# Altium PCB NUC972 DEV BOARD-2 20150128.PcbDoc (part 3 of 5)
Units mil, origin at the board's own origin, x right, y up, seen from the top; angles counter-clockwise.
Board outline 10236.22 x 7677.17 mil, 4 copper layers (Top, 2-GND, 3-POWER, Bottom), stack 35.4 mil thick; 572 components, 593 nets, 2369 pads, 1783 vias.
Unrouted connection lines stored in the file: 1277.
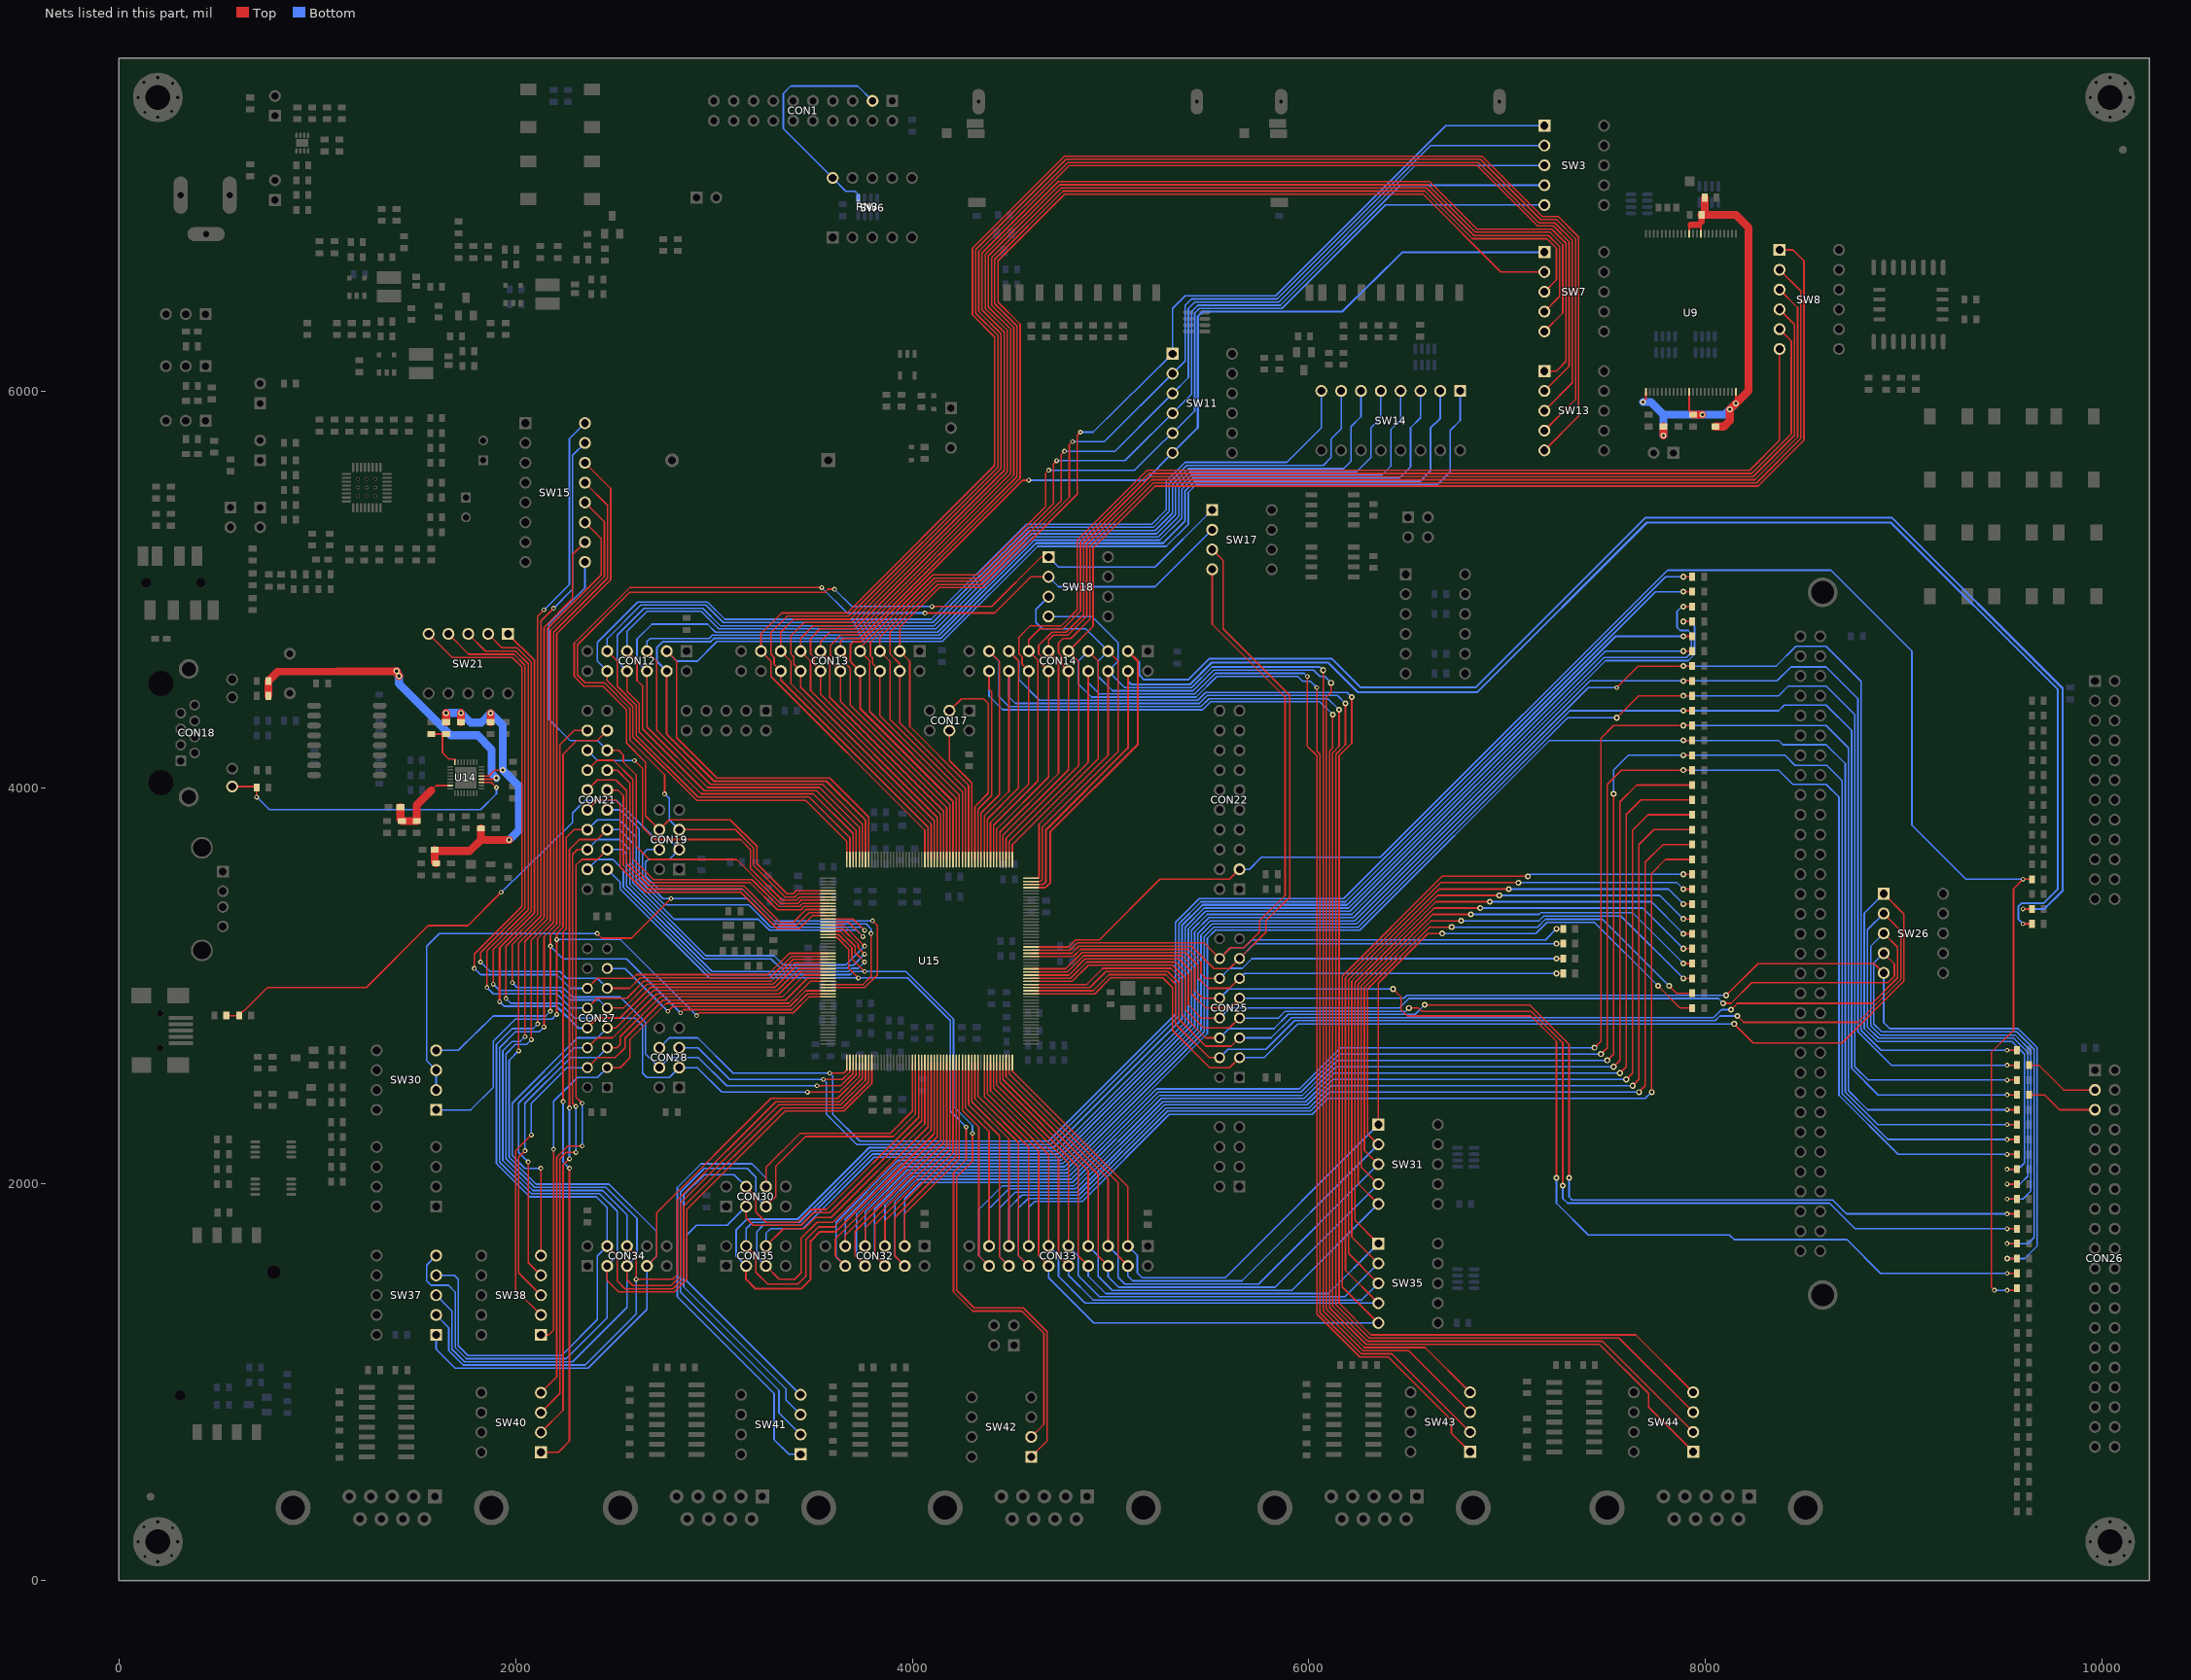
[diagram p5: the nets of this part, all layers, seen from the top]

## Via types
v1: diameter 24, hole 12, Top to Bottom, 1202 vias
v2: diameter 30, hole 16, Top to Bottom, 581 vias

## Nets (pads, with @x,y where several pads share a name; then routed paths per layer and width w, separated by ;. In a path a pad name is that pad's centre, name@x,y a point inside that pad or via, vN(x,y) a via of type N, cw(c..) or ccw(c..) an arc to the next point about the centre after c; other vN are vias at no path point) (continued)
NTRST: CON1.3 RN3.2 SW6.10 | length 1211.6
  Bottom w8: RN3.2@3728,6968.5 3728,6991 3712,7007 3666,7007 SW6.10@3599,7074 3350,7323 3350,7500 3387.5,7537.5 3725,7537.5 CON1.3@3800,7462.5
NVD33: CB2.1 CB6.1 R38.2 R40.2 RV1.2 U9.1 U9.12 U9.24 U9.34 U9.37 | length 2604.3
  Top w10: v2(7684,5944) 7700,5960 U9.1@7700,5995.37 ; U9.12@7916.54,5995.37 7916.54,5900 7917.5,5900 CB6.1@7937.5,5880 ; U9.37@7916.54,6792.62 7916.54,6829.04 7925,6837.5 ; U9.34@7975.59,6792.62 7975.59,6850 ; v2(8152.76,5937.5) U9.24@8152.76,5995.37
  Top w30: 7925,6837.5 7963.09,6837.5 7975.59,6850 7980,6854.41 CB2.1@7980,6887.5
  Top w40: v2(7787.5,5775) R38.2@7787.5,5820 ; CB6.1@7937.5,5880 v2(7984,5880) ; CB2.1@7980,6887.5 7995,6887.5 ; RV1.2@7995,6975 7995,6887.5 ; R40.2@8050,5820 8092,5820 8122,5850 v2(8122,5907) 8152.5,5937.5 v2(8152.76,5937.5) 8216,6000.74 8216,6824 8152.5,6887.5 7995,6887.5
  Bottom w40: v2(7684,5944) 7723.5,5944 7787.5,5880 ; v2(7787.5,5775) 7787.5,5880 ; v2(8152.76,5937.5) 8095.26,5880 v2(7984,5880) 7787.5,5880
NWAIT: CON26.3 RB5.2 | length 384.3
  Top w8: RB5.2@9630,2600 9680,2600 9805,2475 CON26.3@9962.5,2475
NWE: CON26.5 RB7.2 | length 363.6
  Top w8: RB7.2@9630,2450 9709,2450 9784,2375 CON26.5@9962.5,2375
PA0: CON33.3 RL1.1 SW31.1 U15.54 | length 5469.6
  Top w8: U15.54@4504.82,2613.19 4504.82,2570.18 5087.5,1987.5 CON33.3@5087.5,1687.5 ; SW31.1@6350,2300 6350,3014 6600,3264 v2(6672,3264) ; v2(7760,2999.5) 7872,2887.5 RL1.1@7932.5,2887.5
  Bottom w8: CON33.3@5087.5,1687.5 5135,1640 5135,1553 5161,1527 5577,1527 SW31.1@6350,2300 ; v2(6672,3264) 7144,3264 7200,3320 7439.5,3320 v2(7760,2999.5)
PA1: CON33.4 RL2.1 SW31.2 U15.53 | length 5625.9
  Top w8: U15.53@4489.07,2613.19 4489.07,2555.93 5037.5,2007.5 5037.5,1637.5 CON33.4@5087.5,1587.5 ; SW31.2@6350,2200 6296,2254 6296,2984 6608,3296 v2(6720,3296) ; v2(7816,3000) 7853.5,2962.5 RL2.1@7932.5,2962.5
  Bottom w8: CON33.4@5087.5,1587.5 5087.5,1536 5111.5,1512 5662,1512 SW31.2@6350,2200 ; v2(6720,3296) 7152,3296 7192,3336 7480,3336 v2(7816,3000)
PA2: CON33.5 RL3.1 SW31.3 U15.52 | length 5746.2
  Top w8: U15.52@4473.33,2613.19 4473.33,2541.67 4987.5,2027.5 CON33.5@4987.5,1687.5 ; SW31.3@6350,2100 6280,2170 6280,2992 6616,3328 v2(6768,3328) ; v2(7888,3037.5) RL3.1@7932.5,3037.5
  Bottom w8: CON33.5@4987.5,1687.5 5037.5,1637.5 5037.5,1530.5 5072,1496 5746,1496 SW31.3@6350,2100 ; v2(6768,3328) 7160,3328 7184,3352 7573.5,3352 v2(7888,3037.5)
PA3: CON33.6 RL4.1 SW31.4 U15.51 | length 5862.2
  Top w8: U15.51@4457.58,2613.19 4457.58,2527.42 4937.5,2047.5 4937.5,1637.5 CON33.6@4987.5,1587.5 ; SW31.4@6350,2000 6264,2086 6264,3000 6624,3360 v2(6816,3360) ; v2(7888,3112.5) RL4.1@7932.5,3112.5
  Bottom w8: CON33.6@4987.5,1587.5 4987.5,1532.5 5040,1480 5830,1480 SW31.4@6350,2000 ; v2(6816,3360) 7159.5,3360 7167.5,3368 7632.5,3368 v2(7888,3112.5)
PA4: CON33.7 RL5.1 SW31.5 U15.50 | length 5984.8
  Top w8: U15.50@4441.83,2613.19 4441.83,2513.17 4887.5,2067.5 CON33.7@4887.5,1687.5 ; SW31.5@6350,1900 6248,2002 6248,3008 6632,3392 v2(6864,3392) ; v2(7888,3187.5) RL5.1@7932.5,3187.5
  Bottom w8: CON33.7@4887.5,1687.5 4937.5,1637.5 4937.5,1534.5 5008,1464 5914,1464 SW31.5@6350,1900 ; v2(6864,3392) 7683.5,3392 v2(7888,3187.5)
PA5: CON33.8 RL6.1 SW35.1 U15.49 | length 6172.6
  Top w8: U15.49@4426.08,2613.19 4426.08,2498.92 4837.5,2087.5 4837.5,1637.5 CON33.8@4887.5,1587.5 ; SW35.1@6350,1700 6232,1818 6232,3016 6640,3424 v2(6912,3424) ; v2(7888,3262.5) RL6.1@7932.5,3262.5
  Bottom w8: CON33.8@4887.5,1587.5 4887.5,1536.5 4976,1448 6098,1448 SW35.1@6350,1700 ; v2(6912,3424) 7726.5,3424 v2(7888,3262.5)
PA6: CON33.9 RL7.1 SW35.2 U15.48 | length 6301.9
  Top w8: U15.48@4410.33,2613.19 4410.33,2484.67 4787.5,2107.5 CON33.9@4787.5,1687.5 ; SW35.2@6350,1600 6216,1734 6216,3024 6648,3456 v2(6960,3456) ; v2(7888,3337.5) RL7.1@7932.5,3337.5
  Bottom w8: CON33.9@4787.5,1687.5 4837.5,1637.5 4837.5,1538.5 4944,1432 6182,1432 SW35.2@6350,1600 ; v2(6960,3456) 7769.5,3456 v2(7888,3337.5)
PA7: CON33.10 RL8.1 SW35.3 U15.47 | length 6431.1
  Top w8: U15.47@4394.59,2613.19 4394.59,2470.41 4737.5,2127.5 4737.5,1637.5 CON33.10@4787.5,1587.5 ; SW35.3@6350,1500 6200,1650 6200,3032 6656,3488 v2(7008,3488) ; v2(7888,3412.5) RL8.1@7932.5,3412.5
  Bottom w8: CON33.10@4787.5,1587.5 4787.5,1540.5 4912,1416 6266,1416 SW35.3@6350,1500 ; v2(7008,3488) 7812.5,3488 v2(7888,3412.5)
PA8: CON33.11 RL9.1 SW35.4 U15.46 | length 6565
  Top w8: U15.46@4378.84,2613.19 4378.84,2456.16 4687.5,2147.5 CON33.11@4687.5,1687.5 ; SW35.4@6350,1400 6184,1566 6184,3040 6664,3520 v2(7056,3520) ; v2(7888,3487.5) RL9.1@7932.5,3487.5
  Bottom w8: CON33.11@4687.5,1687.5 4737.5,1637.5 4737.5,1534.5 4872,1400 SW35.4@6350,1400 ; v2(7056,3520) 7855.5,3520 v2(7888,3487.5)
PA9: CON33.12 RL10.1 SW35.5 U15.45 | length 6777.2
  Top w8: U15.45@4363.09,2613.19 4363.09,2441.91 4637.5,2167.5 4637.5,1637.5 CON33.12@4687.5,1587.5 ; SW35.5@6350,1300 6168,1482 6168,3048 6672,3552 v2(7104,3552) ; v2(7888,3562.5) RL10.1@7932.5,3562.5
  Bottom w8: CON33.12@4687.5,1587.5 4687.5,1528.5 4916,1300 SW35.5@6350,1300 ; v2(7104,3552) 7114.5,3562.5 v2(7888,3562.5)
PA10: CON33.13 RL11.1 U15.43 | length 5945.9
  Top w8: U15.43@4331.59,2613.19 4331.59,2443.41 4587.5,2187.5 CON33.13@4587.5,1687.5 ; v2(7728,2464) 7728,3568 7797.5,3637.5 RL11.1@7932.5,3637.5
  Bottom w8: CON33.13@4587.5,1687.5 4587.5,1883.5 4616,1912 4856,1912 5296,2352 6016,2352 6096,2432 7696,2432 v2(7728,2464)
PA11: CON33.14 RL12.1 U15.42 | length 6268.4
  Top w8: U15.42@4315.85,2613.19 4315.85,2429.15 4536,2209 4536,1639 CON33.14@4587.5,1587.5 ; v2(7664,2464) 7696,2496 7696,3624 7784.5,3712.5 RL12.1@7932.5,3712.5
  Bottom w8: CON33.14@4587.5,1587.5 4536,1639 4536,1880 4584,1928 4848,1928 5288,2368 6008,2368 6104,2464 v2(7664,2464)
PA12: CON33.15 RL13.1 U15.41 | length 6124.2
  Top w8: U15.41@4300.1,2613.19 4300.1,2415 4487.5,2227.6 CON33.15@4487.5,1687.5 ; v2(7632,2496) 7664,2528 7664,3712 7739.5,3787.5 RL13.1@7932.5,3787.5
  Bottom w8: CON33.15@4487.5,1687.5 4487.5,1879.5 4552,1944 4840,1944 5280,2384 6000,2384 6112,2496 v2(7632,2496)
PA13: CON33.16 RL14.1 U15.40 | length 6452.7
  Top w8: U15.40@4284.35,2613.19 4284.35,2400 4440,2244.35 4440,1635 CON33.16@4487.5,1587.5 ; v2(7600,2528) 7632,2560 7632,3784 7710.5,3862.5 RL14.1@7932.5,3862.5
  Bottom w8: CON33.16@4487.5,1587.5 4440,1635 4440,1880 4520,1960 4832,1960 5272,2400 5992,2400 6120,2528 v2(7600,2528)
PA14: CON33.17 RL15.1 U15.39 | length 6307.2
  Top w8: U15.39@4268.6,2613.19 4268.6,2385 4387.5,2266.1 CON33.17@4387.5,1687.5 ; v2(7568,2560) 7600,2592 7600,3864 7673.5,3937.5 RL15.1@7932.5,3937.5
  Bottom w8: CON33.17@4387.5,1687.5 4387.5,1875.5 4488,1976 4824,1976 5264,2416 5984,2416 6128,2560 v2(7568,2560)
PA15: CON33.18 RL16.1 U15.38 | length 6634.3
  Top w8: U15.38@4252.85,2613.19 4252.85,2371.15 4336,2288 4336,1639 CON33.18@4387.5,1587.5 ; v2(7536,2592) 7568,2624 7568,3928 7652.5,4012.5 RL16.1@7932.5,4012.5
  Bottom w8: CON33.18@4387.5,1587.5 4336,1639 4336,1872 4456,1992 4816,1992 5256,2432 5976,2432 6136,2592 v2(7536,2592)
PB0: CON14.3 RS15.1 U15.105 | length 8405.4
  Top w8: U15.105@4599.31,3495.08 4671.08,3495.08 4680,3504
  Top w10: 4680,3504 4695,3519 4695,3775 5137.5,4217.5 5137.5,4637.5 CON14.3@5087.5,4687.5 ; v1(9600,3387.5) RS15.1@9645,3387.5
  Bottom w10: CON14.3@5087.5,4687.5 5145,4630 5145,4567 5168,4544 5392,4544 5498,4650 6115,4650 6261,4504 6840,4504 7696,5360 8940,5360 9800,4500 9800,3480 9707.5,3387.5 v1(9600,3387.5)
PB1: CON14.4 RS16.1 U15.106 | length 8256.1
  Top w8: U15.106@4599.31,3510.83 4660,3510.83 4664.17,3515
  Top w10: 4664.17,3515 4675,3525.83 4675,3787 5087.5,4199.5 CON14.4@5087.5,4587.5 ; v1(9600,3312.5) RS16.1@9645,3312.5
  Bottom w10: CON14.4@5087.5,4587.5 5087.5,4537.5 5105,4520 5400,4520 5510,4630 6098,4630 6248,4480 6848,4480 7704,5336 8934,5336 9776,4494 9776,3488 9704,3416 9592,3416 9576,3400 9576,3336.5 v1(9600,3312.5)
PB2: CON14.5 SW18.3 SW43.4 U15.107 | length 7460.7
  Top w8: U15.107@4599.31,3526.57 4646.57,3526.57 4655,3535 4655,3799 5037.5,4181.5 5037.5,4637.5 CON14.5@4987.5,4687.5 ; v2(6112,4528) 6112,4480 6088,4456 6088,1368 6280,1176 6586.5,1176 SW43.4@6812.5,950
  Bottom w8: SW18.3@4687.5,4962.5 4624,4899 4624,4832 4656,4800 4875,4800 CON14.5@4987.5,4687.5 4937.5,4637.5 4937.5,4560 5009.5,4488 5416,4488 5520,4592 6024,4592 6056,4560 6080,4560 v2(6112,4528)
PB3: CON14.6 SW18.4 SW43.3 U15.108 | length 7148.3
  Top w8: U15.108@4599.31,3542.32 4635.82,3542.32 4640,3546.5 4640,3816 4987.5,4163.5 CON14.6@4987.5,4587.5 ; v2(6072,4592) 6072,1360 6272,1160 6502.5,1160 SW43.3@6812.5,850
  Bottom w8: SW18.4@4687.5,4862.5 4905.5,4862.5 5037.5,4730.5 5037.5,4637.5 CON14.6@4987.5,4587.5 5071,4504 5408,4504 5512,4608 6056,4608 v2(6072,4592)
PB4: CON14.7 SW43.2 U15.109 | length 6897.1
  Top w8: U15.109@4504.82,3636.81 4504.82,3712.5 4937.5,4145.18 4937.5,4637.5 CON14.7@4887.5,4687.5 ; v1(6040,4504) 6040,4184 6056,4168 6056,1352 6264,1144 6418.5,1144 SW43.2@6812.5,750
  Bottom w8: CON14.7@4887.5,4687.5 4837.5,4637.5 4837.5,4522.5 4904,4456 5432,4456 5536,4560 5944,4560 5968,4536 6008,4536 v1(6040,4504)
PB5: CON14.8 SW43.1 U15.110 | length 6686.5
  Top w8: U15.110@4489.07,3636.81 4489.07,3728 4887.5,4126.43 CON14.8@4887.5,4587.5 ; v1(5992,4560) 5992,4208 6040,4160 6040,1344 6256,1128 6400,1128 6718.75,809.25 6718.75,743.75 SW43.1@6812.5,650
  Bottom w8: CON14.8@4887.5,4587.5 4887.5,4528.5 4944,4472 5424,4472 5528,4576 5976,4576 v1(5992,4560)
PB6: CON14.9 SW8.1 U15.111 | length 6656
  Top w8: U15.111@4473.33,3636.81 4473.33,3744 4840,4110.67 4840,4635 CON14.9@4787.5,4687.5 4912,4812 4912,5208 5224,5520 8264,5520 8496,5752 8496,6656 8441,6711 SW8.1@8372.5,6711
PB7: CON14.10 SW8.2 U15.112 | length 6530.5
  Top w8: U15.112@4457.58,3636.81 4457.58,3760 4787.5,4089.92 CON14.10@4787.5,4587.5 4753.75,4621.25 4753.75,4662.25 4737.5,4678.5 4737.5,4729.5 4760,4752 4800,4752 4896,4848 4896,5216 5216,5536 8256,5536 8480,5760 8480,6503.5 SW8.2@8372.5,6611
PB8: CON14.11 SW8.3 U15.113 | length 6442.5
  Top w8: U15.113@4441.83,3636.81 4441.83,3776 4737.5,4071.67 4737.5,4637.5 CON14.11@4687.5,4687.5 4687.5,4743.5 4712,4768 4784,4768 4880,4864 4880,5224 5208,5552 8248,5552 8464,5768 8464,6419.5 SW8.3@8372.5,6511
PB9: CON14.12 SW8.4 U15.114 | length 6335.8
  Top w8: U15.114@4426.08,3636.81 4426.08,3792 4687.5,4053.42 CON14.12@4687.5,4587.5 4648,4627 4648,4664 4637.5,4674.5 4637.5,4717.5 4704,4784 4776,4784 4864,4872 4864,5232 5200,5568 8240,5568 8448,5776 8448,6335.5 SW8.4@8372.5,6411
PB10: CON14.13 SW8.5 U15.115 | length 6251.4
  Top w8: U15.115@4410.33,3636.81 4410.33,3810.33 4633,4033 4633,4642 CON14.13@4587.5,4687.5 4587.5,4744 4643.5,4800 4760,4800 4848,4888 4848,5240 5192,5584 8232,5584 8432,5784 8432,6251.5 SW8.5@8372.5,6311
PB11: CON14.14 SW8.6 U15.116 | length 6134.9
  Top w8: U15.116@4394.59,3636.81 4394.59,3824 4587.5,4016.91 CON14.14@4587.5,4587.5 4553.75,4621.25 4553.75,4657.75 4537.5,4674 4537.5,4758 4595.5,4816 4752,4816 4832,4896 4832,5248 5184,5600 8222.5,5600 8372.5,5750 SW8.6@8372.5,6211
PB12: CON14.15 SW44.4 U15.117 | length 8102.6
  Top w8: U15.117@4378.84,3636.81 4378.84,3840 4536,3997.16 4536,4639 CON14.15@4487.5,4687.5 ; v2(6216,4456) 6216,4224 6152,4160 6152,1400 6312,1240 7647.5,1240 SW44.4@7937.5,950
  Bottom w8: CON14.15@4487.5,4687.5 4537.5,4637.5 4537.5,4544 4641.5,4440 5440,4440 5480,4480 6192,4480 v2(6216,4456)
PB13: CON14.16 SW44.3 U15.118 | length 7954.2
  Top w8: U15.118@4363.09,3636.81 4363.09,3856 4487.5,3980.41 CON14.16@4487.5,4587.5 ; v2(6184,4424) 6184,4216 6136,4168 6136,1392 6304,1224 7563.5,1224 SW44.3@7937.5,850
  Bottom w8: CON14.16@4487.5,4587.5 4487.5,4456.5 4520,4424 5448,4424 5488,4464 6144,4464 v2(6184,4424)
PB14: CON14.17 SW44.2 U15.119 | length 8237.1
  Top w8: U15.119@4347.34,3636.81 4347.34,3872 4440,3964.66 4440,4635 CON14.17@4387.5,4687.5 ; v2(6152,4392) 6152,4208 6120,4176 6120,1384 6296,1208 7479.5,1208 SW44.2@7937.5,750
  Bottom w8: CON14.17@4387.5,4687.5 4437.5,4637.5 4437.5,4458.5 4488,4408 5456,4408 5496,4448 6096,4448 v2(6152,4392)
PB15: CON14.18 SW44.1 U15.120 | length 8088.1
  Top w8: U15.120@4331.59,3636.81 4331.59,3891.59 4400,3960 4400,4483.5 4387.5,4496 CON14.18@4387.5,4587.5 ; v2(6120,4368) 6120,4200 6104,4184 6104,1376 6288,1192 7464,1192 7712,944 7712,875.5 SW44.1@7937.5,650
  Bottom w8: CON14.18@4387.5,4587.5 4387.5,4460.5 4456,4392 5464,4392 5504,4432 6056,4432 v2(6120,4368)
PC0: CON13.3 SW3.1 SW11.1 U15.123 | length 5920.7
  Top w8: U15.123@4284.35,3636.81 4284.35,4011.65 3987.5,4308.5 3987.5,4637.5 CON13.3@3937.5,4687.5 3937.5,4809.5 4136,5008 4360,5008 4832,5480 4832,5776 v1(4848,5792)
  Bottom w8: v1(4848,5792) 4912,5792 SW11.1@5312.5,6187.5 5312.5,6416.5 5376,6480 5832,6480 6687.5,7335.5 6687.5,7337.5 SW3.1@7187.5,7337.5
PC1: CON13.4 SW3.2 SW11.2 U15.124 | length 5940
  Top w8: U15.124@4268.6,3636.81 4268.6,3995.4 3937.5,4326.5 CON13.4@3937.5,4587.5 3937.5,4624 3887.5,4674 3887.5,4783.5 4128,5024 4352,5024 4792,5464 4792,5728 v1(4808,5744)
  Bottom w8: v1(4808,5744) 4968,5744 4984,5760 SW11.2@5312.5,6087.5 5376,6151 5376,6432 5408,6464 5840,6464 6613.5,7237.5 SW3.2@7187.5,7237.5
PC2: CON13.5 SW3.3 SW11.3 U15.125 | length 5969.8
  Top w8: U15.125@4252.85,3636.81 4252.85,3979.15 3887.5,4344.5 3887.5,4637.5 CON13.5@3837.5,4687.5 3837.5,4757.5 4120,5040 4344,5040 4752,5448 4752,5680 v1(4768,5696)
  Bottom w8: v1(4768,5696) 5024,5696 5258.51,5932.79 SW11.3@5312.5,5987.5 5392,6067 5392,6416 5424,6448 5848,6448 6537.5,7137.5 SW3.3@7187.5,7137.5
PC3: CON13.6 SW3.4 SW11.4 U15.126 | length 5996.2
  Top w8: U15.126@4237.11,3636.81 4237.11,3962.89 3837.5,4362.5 CON13.6@3837.5,4587.5 3800,4625 3800,4653.5 3789.21,4664.29 3789.21,4733.21 4112,5056 4336,5056 4712,5432 4712,5632 v1(4728,5648)
  Bottom w8: v1(4728,5648) 5072,5648 5104.04,5679.96 SW11.4@5312.5,5887.5 5408,5983 5408,6400 5440,6432 5856,6432 6462,7038 6462.5,7037.5 SW3.4@7187.5,7037.5
PC4: CON13.7 SW3.5 SW11.5 U15.127 | length 6030.3
  Top w8: U15.127@4221.36,3636.81 4221.36,3946.64 3785,4383 3785,4640 CON13.7@3737.5,4687.5 3737.5,4705.5 4104,5072 4328,5072 4672,5416 4672,5584 v1(4688,5600)
  Bottom w8: v1(4688,5600) 5120,5600 5256.31,5735.66 SW11.5@5312.5,5787.5 5424,5899 5424,6392 5448,6416 5864,6416 6386.5,6938.5 6387.5,6937.5 SW3.5@7187.5,6937.5
PC5: CON13.8 SW7.1 SW11.6 U15.128 | length 5945.3
  Top w8: 4201,3935 4205.61,3930.39 U15.128@4205.61,3636.81
  Top w10: 4201,3935 3737.5,4398.5 CON13.8@3737.5,4587.5 3688,4637 3688,4720 3704,4736 3744,4736 4558,5550 v1(4587.5,5550)
  Bottom w10: v1(4587.5,5550) 5177,5550 SW11.6@5312.5,5687.5 5440,5815 5440,6376 5464,6400 6168,6400 6472,6700 SW7.1@7187.5,6700
PC6: CON13.9 SW7.2 U15.129 | length 6775.2
  Top w8: U15.129@4189.86,3636.81 4189.86,3914.14 3687.5,4416.5 3687.5,4600.5 3672,4616 3672,4653 CON13.9@3637.5,4687.5 3637.5,4736 3653.5,4752 3736,4752 4544,5560 4544,6336 4432,6448 4432,6656 4768,6992 6576,6992 6968,6600 SW7.2@7187.5,6600
PC7: CON13.10 SW7.3 U15.130 | length 7096.5
  Top w8: U15.130@4174.11,3636.81 4174.11,3897.89 3637.5,4434.5 CON13.10@3637.5,4587.5 3600,4625 3600,4656 3587.5,4668.5 3587.5,4715.5 3640,4768 3728,4768 4528,5568 4528,6328 4416,6440 4416,6664 4760,7008 6584,7008 6824,6768 7200,6768 7248,6720 7248,6560.5 SW7.3@7187.5,6500
PC8: CON13.11 SW7.4 U15.131 | length 7313.3
  Top w8: U15.131@4158.37,3636.81 4158.37,3881.63 3585,4455 3585,4640 CON13.11@3537.5,4687.5 3537.5,4736 3585.5,4784 3720,4784 4512,5576 4512,6320 4400,6432 4400,6672 4752,7024 6592,7024 6832,6784 7208,6784 7264,6728 7264,6476.5 SW7.4@7187.5,6400
PC9: CON13.12 SW7.5 U15.132 | length 7527.1
  Top w8: U15.132@4142.62,3636.81 4142.62,3865.38 3537.5,4470.5 CON13.12@3537.5,4587.5 3504.75,4620.25 3504.75,4656.75 3487.5,4674 3487.5,4751.5 3536,4800 3712,4800 4496,5584 4496,6312 4384,6424 4384,6680 4744,7040 6600,7040 6840,6800 7216,6800 7280,6736 7280,6392.5 SW7.5@7187.5,6300
PC10: CON13.13 SW13.1 U15.133 | length 7867.6
  Top w8: U15.133@4126.87,3636.81 4126.87,3849.13 3487.5,4488.5 3487.5,4637.5 CON13.13@3437.5,4687.5 3437.5,4752 3501.5,4816 3704,4816 4480,5592 4480,6304 4368,6416 4368,6688 4736,7056 6608,7056 6848,6816 7224,6816 7296,6744 7296,6148 7248,6100 SW13.1@7187.5,6100
PC11: CON13.14 SW13.2 U15.134 | length 8096.7
  Top w8: U15.134@4111.12,3636.81 4111.12,3832.88 3437.5,4506.5 CON13.14@3437.5,4587.5 3402.8,4622.2 3402.8,4658.7 3387.5,4674 3387.5,4763.5 3456,4832 3696,4832 4464,5600 4464,6296 4352,6408 4352,6696 4792,7136 6848,7136 7152,6832 7232,6832 7312,6752 7312,6124.5 SW13.2@7187.5,6000
PC12: CON13.15 SW13.3 U15.135 | length 8313.5
  Top w8: U15.135@4095.37,3636.81 4095.37,3816.63 3387.5,4524.5 3387.5,4637.5 CON13.15@3337.5,4687.5 3337.5,4784 3401.5,4848 3688,4848 4448,5608 4448,6288 4336,6400 4336,6704 4784,7152 6856,7152 7160,6848 7240,6848 7328,6760 7328,6040.5 SW13.3@7187.5,5900
PC13: CON13.16 SW13.4 U15.136 | length 8517
  Top w8: U15.136@4079.63,3636.81 4079.63,3800.37 3337.5,4542.5 CON13.16@3337.5,4587.5 3304,4621 3304,4656 3287.5,4672.5 3287.5,4782 3369.5,4864 3680,4864 4432,5616 4432,6280 4320,6392 4320,6712 4776,7168 6864,7168 7168,6864 7248,6864 7344,6768 7344,5956.5 SW13.4@7187.5,5800
PC14: CON13.17 SW13.5 U15.137 | length 8718.3
  Top w8: U15.137@4063.88,3636.81 4063.88,3784.12 3287.5,4560.5 3287.5,4637.5 CON13.17@3237.5,4687.5 3237.5,4776 3341.5,4880 3672,4880 4416,5624 4416,6272 4304,6384 4304,6720 4768,7184 6872,7184 7176,6880 7256,6880 7360,6776 7360,5872.5 SW13.5@7187.5,5700
PD0: CON12.3 SW14.1 U15.155 | length 6693.3
  Top w8: CON12.3@2762.5,4687.5 2812.5,4637.5 2812.5,4251.5 3016,4048 3584,4048 3780.41,3851.59 U15.155@3780.41,3636.81
  Bottom w8: CON12.3@2762.5,4687.5 2812.5,4637.5 2917.5,4637.5 3016,4736 4152,4736 4632,5216 5280,5216 5392,5328 5392,5488 5432,5528 6648,5528 6712.5,5592.5 6712.5,5800.5 6762.5,5850.5 SW14.1@6762.5,6000
PD1: CON12.4 SW14.2 U15.156 | length 6619
  Top w8: 3760,3840 3764.67,3835.33 U15.156@3764.67,3636.81
  Top w10: CON12.4@2762.5,4587.5 2762.5,4269.5 3000,4032 3568,4032 3760,3840
  Bottom w10: CON12.4@2762.5,4587.5 2712.5,4637.5 2712.5,4704.5 2744,4736 2984,4736 3000,4752 4144,4752 4624,5232 5264,5232 5376,5344 5376,5496 5424,5544 6560,5544 6612.5,5596.5 6612.5,5812.5 6662.5,5862.5 SW14.2@6662.5,6000
PD2: CON12.5 SW14.3 U15.157 | length 6583.4
  Top w8: CON12.5@2662.5,4687.5 2712.5,4637.5 2712.5,4287.5 2984,4016 3548.92,4016 3748.92,3816 U15.157@3748.92,3636.81
  Bottom w8: CON12.5@2662.5,4687.5 2662.5,4736 2678.5,4752 2976,4752 2992,4768 4136,4768 4616,5248 5248,5248 5360,5360 5360,5504 5416,5560 6456,5560 6512.5,5616.5 6512.5,5814 6562.5,5864 SW14.3@6562.5,6000
PD3: CON12.6 SW14.4 U15.158 | length 6585.9
  Top w8: CON12.6@2662.5,4587.5 2662.5,4305.5 2968,4000 3533.17,4000 3733.17,3800 U15.158@3733.17,3636.81
  Bottom w8: CON12.6@2662.5,4587.5 2612.5,4637.5 2612.5,4748.5 2688,4824 2968,4824 3008,4784 4128,4784 4608,5264 5240,5264 5344,5368 5344,5512 5408,5576 6368,5576 6412.5,5620.5 6412.5,5804.5 6462.5,5854.5 SW14.4@6462.5,6000
PD4: CON12.7 SW14.5 U15.159 | length 6586.4
  Top w8: CON12.7@2562.5,4687.5 2612.5,4637.5 2612.5,4539.5 2640,4512 2640,4296 2952,3984 3517.42,3984 3717.42,3784 U15.159@3717.42,3636.81
  Bottom w8: CON12.7@2562.5,4687.5 2562.5,4786.5 2664,4888 2936,4888 3024,4800 4120,4800 4600,5280 5232,5280 5328,5376 5328,5520 5400,5592 6240,5592 6312.5,5664.5 6312.5,5814 6362.5,5864 SW14.5@6362.5,6000
PD5: CON12.8 SW14.6 U15.160 | length 6551.9
  Top w8: CON12.8@2562.5,4587.5 2562.5,4485.5 2624,4424 2624,4280 2936,3968 3501.67,3968 3701.67,3768 U15.160@3701.67,3636.81
  Bottom w8: CON12.8@2562.5,4587.5 2512.5,4637.5 2512.5,4768.5 2648,4904 2944,4904 3032,4816 4112,4816 4592,5296 5224,5296 5312,5384 5312,5528 5392,5608 6176,5608 6212.5,5644.5 6212.5,5820.5 6262.5,5870.5 SW14.6@6262.5,6000
PD6: CON12.9 SW14.7 U15.161 | length 6490.5
  Top w8: CON12.9@2462.5,4687.5 2512.5,4637.5 2512.5,4511.5 2608,4416 2608,4264 2920,3952 3480,3952 3685.93,3746.07 U15.161@3685.93,3636.81
  Bottom w8: CON12.9@2462.5,4687.5 2462.5,4750.5 2632,4920 2960,4920 3048,4832 4104,4832 4584,5312 5216,5312 5296,5392 5296,5536 5384,5624 6072,5624 6112.5,5664.5 6112.5,5758 6162.5,5808 SW14.7@6162.5,6000
PD7: CON12.10 SW14.8 U15.162 | length 6379.9
  Top w8: CON12.10@2462.5,4587.5 2462.5,4537.5 2592,4408 2592,4256 2912,3936 3462.18,3936 3670.18,3728 U15.162@3670.18,3636.81
  Bottom w8: CON12.10@2462.5,4587.5 2412.5,4637.5 2412.5,4732.5 2616,4936 2968,4936 3056,4848 4096,4848 4576,5328 5208,5328 5280,5400 5280,5544 5376,5640 5888,5640 6062.5,5814.5 SW14.8@6062.5,6000
PD8: CON32.3 RB12.1 RL23.1 U15.37 | length 10423.5
  Top w8: CON32.3@3962.5,1687.5 3962.5,1850.5 4237.11,2125.11 U15.37@4237.11,2613.19 ; v2(7504,2624) 7536,2656 v2(7536,3968) ; v2(7888,4162.5) RL23.1@7932.5,4162.5 ; v1(9520,2225) RB12.1@9570,2225
  Bottom w8: CON32.3@3962.5,1687.5 3962.5,1928 4042.5,2008 4808,2008 5248,2448 5968,2448 6144,2624 v2(7504,2624) ; v2(7536,3968) 7536,4088 7610.5,4162.5 v2(7888,4162.5) 8400,4162.5 8450.5,4112 8610.5,4112 8688,4034.5 8688,2456 8919,2225 v1(9520,2225)
PD9: CON32.4 RB11.1 RL24.1 U15.36 | length 10584.9
  Top w8: CON32.4@3962.5,1587.5 3912.5,1637.5 3912.5,1832.5 4221.36,2141.36 U15.36@4221.36,2613.19 ; v2(7472,2656) 7504,2688 7504,4016 7575.5,4087.5 v2(7888,4087.5) RL24.1@7932.5,4087.5 ; v1(9520,2150) RB11.1@9570,2150
  Bottom w8: CON32.4@3962.5,1587.5 3912,1638 3912,1912 4024,2024 4800,2024 5240,2464 5960,2464 6152,2656 v2(7472,2656) ; v2(7888,4087.5) 8368,4087.5 8439.5,4016 8608,4016 8672,3952 8672,2448 8970,2150 v1(9520,2150)
PD10: CON32.5 RB10.1 RL25.1 U15.35 | length 10738.5
  Top w8: CON32.5@3862.5,1687.5 3862.5,1814.5 4205.61,2157.61 U15.35@4205.61,2613.19 ; v2(7440,2688) 7472,2720 7472,4248 7536.5,4312.5 v2(7888,4312.5) RL25.1@7932.5,4312.5 ; v1(9520,2375) RB10.1@9570,2375
  Bottom w8: CON32.5@3862.5,1687.5 3862.5,1894.5 4008,2040 4792,2040 5232,2480 5952,2480 6160,2688 v2(7440,2688) ; v2(7888,4312.5) 8608,4312.5 8720,4200.5 8720,2472 8817,2375 v1(9520,2375)
PD11: CON32.6 RB9.1 RL26.1 U15.34 | length 10348.2
  Top w8: CON32.6@3862.5,1587.5 3812.5,1637.5 3812.5,1796.5 4189.86,2173.86 U15.34@4189.86,2613.19 ; v2(7888,4237.5) RL26.1@7932.5,4237.5 ; v1(9520,2300) RB9.1@9570,2300
  Bottom w8: CON32.6@3862.5,1587.5 3810,1640 3810,1874 3992,2056 4784,2056 5488,2760 5488,3240 5528,3280 6256,3280 7213.5,4237.5 v2(7888,4237.5) 8368,4237.5 8389.5,4216 8608,4216 8704,4120 8704,2464 8868,2300 v1(9520,2300)
PD12: CON32.7 RB8.1 RL27.1 U15.33 | length 10362.9
  Top w8: CON32.7@3762.5,1687.5 3762.5,1778.5 4174.11,2190.11 U15.33@4174.11,2613.19 ; v2(7552,4352) 7662.5,4462.5 v2(7888,4462.5) RL27.1@7932.5,4462.5 ; v1(9520,2525) RB8.1@9570,2525
  Bottom w8: CON32.7@3762.5,1687.5 3762.5,1858.5 3976,2072 4776,2072 5472,2768 5472,3248 5520,3296 6248,3296 7304,4352 v2(7552,4352) ; v2(7888,4462.5) 8368,4462.5 8417.5,4512 8608,4512 8752,4368 8752,2592 8819,2525 v1(9520,2525)
PD13: CON32.8 RB7.1 RL28.1 U15.32 | length 10561.1
  Top w8: CON32.8@3762.5,1587.5 3712.5,1637.5 3712.5,1760.5 4158.37,2206.37 U15.32@4158.37,2613.19 ; v2(7888,4387.5) RL28.1@7932.5,4387.5 ; v1(9520,2450) RB7.1@9570,2450
  Bottom w8: CON32.8@3762.5,1587.5 3720,1630 3720,1848 3960,2088 4768,2088 5456,2776 5456,3256 5512,3312 6240,3312 7315.5,4387.5 v2(7888,4387.5) 8368,4387.5 8396.5,4416 8608,4416 8736,4288 8736,2584 8870,2450 v1(9520,2450)
PD14: CON32.9 RB6.1 RL29.1 U15.31 | length 10564.3
  Top w8: CON32.9@3662.5,1687.5 3662.5,1742.5 4142.62,2222.62 U15.31@4142.62,2613.19 ; v1(7552,4504) 7660.5,4612.5 v2(7888,4612.5) RL29.1@7932.5,4612.5 ; v1(9520,2675) RB6.1@9570,2675
  Bottom w8: CON32.9@3662.5,1687.5 3662.5,1822.5 3944,2104 4760,2104 5440,2784 5440,3264 5504,3328 6232,3328 7408,4504 v1(7552,4504) ; v2(7888,4612.5) 8356.5,4612.5 8456,4712 8608,4712 8784,4536 8784,2776 8885,2675 v1(9520,2675)
PD15: CON32.10 RB5.1 RL30.1 U15.30 | length 10754.6
  Top w8: CON32.10@3662.5,1587.5 3612.5,1637.5 3612.5,1724.5 4126.87,2238.87 U15.30@4126.87,2613.19 ; v2(7888,4537.5) RL30.1@7932.5,4537.5 ; v1(9520,2600) RB5.1@9570,2600
  Bottom w8: CON32.10@3662.5,1587.5 3616,1634 3616,1808 3928,2120 4752,2120 5424,2792 5424,3272 5496,3344 6224,3344 7417.5,4537.5 v2(7888,4537.5) 8360,4537.5 8430.5,4608 8608,4608 8768,4448 8768,2768 8936,2600 v1(9520,2600)
PE0: CON21.3 SW42.2 U15.182 | length 4877.7
  Top w8: U15.182@3575.69,3243.11 3620.89,3243.11 3680,3184 3680,3088 v1(3728,3040) ; v1(4272,2288) 4272,2122 4208,2058 4208,1456 4304,1360 4552,1360 4664,1248 4664,789 SW42.2@4600,725
  Bottom w8: CON21.3@2462.5,3587.5 2528,3522 2528,3488 2976,3040 v1(3728,3040) 3976,3040 4192,2824 4192,2368 v1(4272,2288)
PE1: CON21.4 SW42.1 U15.181 | length 5206.1
  Top w8: U15.181@3575.69,3258.86 3629.14,3258.86 3696,3192 3696,3136 v1(3760,3072) ; v1(4304,2256) 4304,2116.5 4224,2036.5 4224,1464 4312,1376 4560,1376 4680,1256 4680,705 SW42.1@4600,625
  Bottom w8: CON21.4@2362.5,3587.5 2412.5,3637.5 2490.5,3637.5 2544,3584 2544,3496 2983.7,3056.3 3688.3,3056.3 3704,3072 v1(3760,3072) 3968,3072 4208,2832 4208,2392 4304,2296 v1(4304,2256)
PE2: CON21.5 SW40.4 U15.180 | length 4925.7
  Top w8: SW40.4@2128,948 2208,1028 2208,2136 2264,2192 v1(2336,2192) ; v1(2336,2408) 2304,2440 2304,3608 2333.5,3637.5 2412.5,3637.5 CON21.5@2462.5,3687.5 ; U15.180@3575.69,3274.61 3637.39,3274.61 3712,3200 3712,3168 v1(3760,3120)
  Bottom w8: v1(2336,2192) v1(2336,2408) ; CON21.5@2462.5,3687.5 2536.5,3687.5 2560,3664 2560,3504 2991.4,3072.6 3680.6,3072.6 3696,3088 3728,3088 v1(3760,3120)
PE3: CON21.6 SW40.3 U15.179 | length 5074.7
  Top w8: SW40.3@2128,848 2224,944 2224,2128 2256,2160 v1(2304,2160) ; v1(2304,2392) 2288,2408 2288,3663.5 2312,3687.5 CON21.6@2362.5,3687.5 ; U15.179@3575.69,3290.35 3645.65,3290.35 3728,3208 3728,3192 v1(3760,3160)
  Bottom w8: v1(2304,2160) v1(2304,2392) ; CON21.6@2362.5,3687.5 2412.5,3737.5 2526.5,3737.5 2576,3688 2576,3512 2952,3136 3288,3136 3335.1,3088.9 3672.9,3088.9 3688,3104 3704,3104 v1(3760,3160)
PE4: CON21.7 SW40.2 U15.178 | length 5196.2
  Top w8: SW40.2@2128,748 2240,860 2240,2096 v1(2272,2128) ; v1(2272,2384) 2272,3688 2321.5,3737.5 2412.5,3737.5 CON21.7@2462.5,3787.5 ; U15.178@3575.69,3306.1 3653.9,3306.1 v1(3760,3200)
  Bottom w8: v1(2272,2128) v1(2272,2384) ; CON21.7@2462.5,3787.5 2524.5,3787.5 2592,3720 2592,3520 2960,3152 3304,3152 3350.8,3105.2 3665.2,3105.2 v1(3760,3200)
PE5: CON21.8 SW40.1 U15.177 | length 5346.2
  Top w8: SW40.1@2128,648 2216,648 2272,704 v1(2272,2080) ; v1(2240,2416) 2240,3272 2256,3288 2256,3747.5 2296,3787.5 CON21.8@2362.5,3787.5 ; U15.177@3575.69,3321.85 3678.15,3321.85 v1(3752,3248)
  Bottom w8: v1(2240,2416) 2240,2112 v1(2272,2080) ; CON21.8@2362.5,3787.5 2412.5,3837.5 2522.5,3837.5 2608,3752 2608,3528 2800,3336 3224,3336 3280,3280 3720,3280 v1(3752,3248)
PE6: CON21.9 U15.176 | length 1923
  Top w8: U15.176@3560,3337.6 U15.176@3575.69,3337.6 3702.4,3337.6 v1(3760,3280)
  Bottom w8: CON21.9@2462.5,3887.5 2528.5,3887.5 2624,3792 2624,3536 2752,3408 3176,3408 3288,3296 3744,3296 v1(3760,3280)
PE7: CON21.10 U15.175 | length 1712.8
  Top w8: CON21.10@2362.5,3887.5 2412.5,3937.5 2502.5,3937.5 2528,3912 2528,3600 2656,3472 3136,3472 3320,3288 3430.65,3288 3496,3353.35 U15.175@3575.69,3353.35
PE8: CON21.11 U15.174 | length 1629.5
  Top w8: CON21.11@2462.5,3987.5 2516.5,3987.5 2544,3960 2544,3608 2664,3488 3144,3488 3328,3304 3414.91,3304 3480,3369.09 U15.174@3575.69,3369.09
PE9: CON21.12 U15.173 | length 1773.5
  Top w8: CON21.12@2362.5,3987.5 2412.5,4037.5 2506.5,4037.5 2560,3984 2560,3616 2672,3504 3152,3504 3336,3320 3400,3320 3464.84,3384.84 U15.173@3575.69,3384.84
PE10: CON21.13 U15.172 | length 1645.8
  Top w8: CON21.13@2462.5,4087.5 2512.5,4087.5 2576,4024 2576,3624 2680,3520 3184,3520 3320,3384 3439.41,3384 3456,3400.59 U15.172@3575.69,3400.59
PE11: CON21.14 U15.171 | length 1780.2
  Top w8: CON21.14@2362.5,4087.5 2412.5,4137.5 2494.5,4137.5 2592,4040 2592,3640 2696,3536 3192.34,3536 3328,3400.34 3432.34,3400.34 3448.34,3416.34 U15.171@3575.69,3416.34
PE12: CON21.15 SW15.9 U15.170 | length 2899.3
  Top w8: CON21.15@2462.5,4187.5 2520,4187.5 2544,4163.5 2544,4128 2608,4064 2608,3704 2674.5,3637.5 3114.5,3637.5 3336,3416 3424,3416 3440.09,3432.09 U15.170@3575.69,3432.09
  Bottom w8: SW15.9@2350,5137.5 2350,5006 2168.08,4824.08 2167.85,4344.15 2274.5,4237.5 2412.5,4237.5 CON21.15@2462.5,4187.5
PE13: CON21.16 U15.169 | length 1762.3
  Top w8: v1(2600,4136) 2640,4096 2640,3800 2702.5,3737.5 3134.5,3737.5 3184,3688 3184,3592 3344,3432 3416,3432 3431.83,3447.83 U15.169@3575.69,3447.83
  Bottom w8: CON21.16@2362.5,4187.5 2414,4136 v1(2600,4136)
PE14: CON21.17 SW30.1 U15.201 | length 4105.9
  Top w8: v1(2208,2856) v1(2208,3233.25) 2208,3264 2240,3296 2240,4168 2309.5,4237.5 2412.5,4237.5 CON21.17@2462.5,4287.5 ; v1(2912.5,2850) 2926.5,2864 3400,2864 3479.9,2943.9 U15.201@3575.69,2943.9
  Bottom w8: SW30.1@1600,2374.5 1774.5,2374.5 1888,2488 1888,2720 2000,2832 2184,2832 v1(2208,2856) ; v1(2208,3233.25) 2529.25,3233.25 v1(2912.5,2850)
PE15: CON21.18 SW30.4 U15.200 | length 3767.5
  Top w8: v1(2176,2872) v1(2176,3200) 2176,3256 2224,3304 2224,4216 2296,4287.5 CON21.18@2362.5,4287.5 ; v1(2832,2864) 2848,2880 3392,2880 3471.65,2959.65 U15.200@3575.69,2959.65
  Bottom w8: SW30.4@1600,2674.5 1712,2674.5 1887.79,2848 2152,2848 v1(2176,2872) ; v1(2176,3200) 2240,3136 2560,3136 v1(2832,2864)
PF0: CON27.3 SW38.1 U15.196 | length 2915.7
  Top w8: SW38.1@2128,1240 2168,1240 2192,1264 v1(2192,2176) ; CON27.3@2462.5,2587.5 2528,2587.5 2576,2635.5 2576,2728 2760,2912 3377.36,2912 3488,3022.64 U15.196@3575.69,3022.64
  Bottom w8: v1(2192,2176) 2192,2417 2312.5,2537.5 2412.5,2537.5 CON27.3@2462.5,2587.5
PF1: CON27.4 SW38.2 U15.195 | length 2939.1
  Top w8: v1(2080,2248) 2000,2168 2000,1468 SW38.2@2128,1340 ; CON27.4@2362.5,2587.5 2412.5,2637.5 2501.5,2637.5 2552,2688 2552,2736 2744,2928 3361.61,2928 3472,3038.39 U15.195@3575.69,3038.39
  Bottom w8: v1(2080,2248) 2080,2408 2259.5,2587.5 CON27.4@2362.5,2587.5
PF2: CON27.5 SW38.3 U15.194 | length 2846.4
  Top w8: v1(2048,2168) 2016,2136 2016,1552 SW38.3@2128,1440 ; CON27.5@2462.5,2687.5 2512,2687.5 2528.5,2704 2528.5,2744 2728.5,2944 3345.87,2944 3456,3054.13 U15.194@3575.69,3054.13
  Bottom w8: v1(2048,2168) 2048,2408 2277.5,2637.5 2412.5,2637.5 CON27.5@2462.5,2687.5
PF3: CON27.6 SW38.4 U15.193 | length 2747.9
  Top w8: v1(2064,2112) 2064,1604 SW38.4@2128,1540 ; CON27.6@2362.5,2687.5 2412.5,2737.5 2489.5,2737.5 2712,2960 3330.12,2960 3440,3069.88 U15.193@3575.69,3069.88
  Bottom w8: v1(2064,2112) 2016,2160 2016,2407.5 2296,2687.5 CON27.6@2362.5,2687.5
PF4: CON27.7 SW38.5 U15.192 | length 2747.3
  Top w8: SW38.5@2128,1640 v1(2128,2080) ; CON27.7@2462.5,2787.5 2507.5,2787.5 2696,2976 3320,2976 3429.63,3085.63 U15.192@3575.69,3085.63
  Bottom w8: v1(2128,2080) 2048,2080 1984,2144 1984,2408 2311.25,2736.75 2312,2737.5 2412.5,2737.5 CON27.7@2462.5,2787.5
PF5: CON27.8 SW21.1 U15.191 | length 3823.5
  Top w8: 3402.62,3088 3416,3101.38 U15.191@3575.69,3101.38
  Top w10: v1(1920,2920) 1920,3192 2096,3368 2096,4640.5 SW21.1@1962,4774.5 ; CON27.8@2362.5,2787.5 2412.5,2837.5 2525.5,2837.5 2680,2992 3306.62,2992 3402.62,3088
  Bottom w10: v1(1920,2920) 1944,2896 2208,2896 2316.5,2787.5 CON27.8@2362.5,2787.5
PF6: CON27.9 SW21.2 U15.190 | length 3813.3
  Top w8: SW21.2@1862,4774.5 1932.5,4704 2008,4704 2080,4632 2080,3376 1888,3184 v1(1888,3008) ; CON27.9@2462.5,2887.5 2543.5,2887.5 2664,3008 3298.87,3008 3408,3117.13 U15.190@3575.69,3117.13
  Bottom w8: v1(1888,3008) 1920,2976 2224,2976 2271.33,2928.67 2421.33,2928.67 CON27.9@2462.5,2887.5
PF7: CON27.10 SW21.3 U15.189 | length 3947.1
  Top w8: SW21.3@1762,4774.5 1848.5,4688 2000,4688 2064,4624 2064,3384 1856,3176 v1(1856,2992) ; CON27.10@2362.5,2887.5 2412.5,2937.5 2561.5,2937.5 2648,3024 3291.13,3024 3400,3132.87 U15.189@3575.69,3132.87
  Bottom w8: v1(1856,2992) 1888,2960 2207.5,2960 2280,2887.5 CON27.10@2362.5,2887.5
PF8: CON27.11 SW21.4 U15.188 | length 3913.7
  Top w8: SW21.4@1662,4774.5 1764.5,4672 1992,4672 2048,4616 2048,3392 1824,3168 v1(1824,3120) ; CON27.11@2462.5,2987.5 2576,2987.5 2628.5,3040 3283.38,3040 3392,3148.62 U15.188@3575.69,3148.62
  Bottom w8: v1(1824,3120) 1872,3072 2224,3072 2258.5,3037.5 2412.5,3037.5 CON27.11@2462.5,2987.5
PF9: CON27.12 SW21.5 U15.187 | length 4057
  Top w8: SW21.5@1562,4774.5 1680.5,4656 1984,4656 2032,4608 2032,3400 1792,3160 v1(1792,3088) ; CON27.12@2362.5,2987.5 2412.5,3037.5 2589.5,3037.5 2608,3056 3272,3056 3380.37,3164.37 U15.187@3575.69,3164.37
  Bottom w8: v1(1792,3088) 1824,3056 2208,3056 2276.5,2987.5 CON27.12@2362.5,2987.5
PF10: CON27.13 U15.199 | length 1245.8
  Top w8: v1(2768,2871.39) 2792,2895.39 3383.39,2895.39 3463.39,2975.39 U15.199@3575.69,2975.39
  Bottom w8: CON27.13@2462.5,3087.5 2551.89,3087.5 v1(2768,2871.39)
PF11: CON30.3 SW41.4 U15.25 | length 2873
  Top w8: CON30.3@3162.5,1887.5 3162.5,1829.5 3200,1792 3440,1792 3504,1856 3584,1856 4048.13,2320.13 U15.25@4048.13,2613.19
  Bottom w8: CON30.3@3162.5,1887.5 3067,1792 2912,1792 2864,1744 2864,1511 SW41.4@3437.5,937.5
PF12: CON30.4 SW41.3 U15.24 | length 3218.9
  Top w8: CON30.4@3162.5,1987.5 3212.5,1937.5 3212.5,1859.5 3264,1808 3424,1808 3488,1872 3568,1872 4032.38,2336.38 U15.24@4032.38,2613.19
  Bottom w8: CON30.4@3162.5,1987.5 3102,2048 2952,2048 2848,1944 2848,1483 3363,968 3363,912 SW41.3@3437.5,837.5
PF13: CON30.5 SW41.2 U15.23 | length 3387.6
  Top w8: CON30.5@3262.5,1887.5 3312.5,1937.5 3312.5,2090.5 3462,2240 3904,2240 4016.63,2352.63 U15.23@4016.63,2613.19
  Bottom w8: CON30.5@3262.5,1887.5 3212.5,1937.5 3212.5,2035.5 3168,2080 2952,2080 2832,1960 2832,1456 3328,960 3328,847 SW41.2@3437.5,737.5
PF14: CON30.6 SW41.1 U15.22 | length 3404.5
  Top w8: CON30.6@3262.5,1987.5 3262.5,2083.86 3433.75,2255.11 3888,2255.11 4000.89,2368 U15.22@4000.89,2613.19
  Bottom w8: CON30.6@3262.5,1987.5 3262.5,2032 3192,2102.5 2936,2102.5 2816,1982.5 2816,1432 3304,944 3304,712 3378.5,637.5 SW41.1@3437.5,637.5
PG0: CON28.3 SW15.16 U15.4 | length 5308.4
  Top w8: v1(1952,2936) 1952,3200 2112,3360 2112,4864 v1(2144,4896) ; v1(3472,2464) 3632,2464 3717.42,2549.42 U15.4@3717.42,2613.19
  Bottom w8: v1(1952,2936) 1976,2912 2224,2912 2298.5,2837.5 2602.5,2837.5 2640,2800 2640,2560 2662.5,2537.5 2775,2537.5 CON28.3@2825,2587.5 2916.5,2587.5 3040,2464 v1(3472,2464) ; v1(2144,4896) 2272,5024 2272,5759.5 SW15.16@2350,5837.5
PG1: CON28.4 SW15.15 U15.3 | length 5022.1
  Top w8: v1(1984,3016) 1984,3208 2128,3352 2128,4840 v1(2192,4904) ; v1(3520,2496) 3640,2496 3701.67,2557.67 U15.3@3701.67,2613.19
  Bottom w8: v1(1984,3016) 2008,2992 2240,2992 2288.33,2943.67 2528.33,2943.67 2656,2816 2656,2656.5 CON28.4@2725,2587.5 2775,2637.5 2922.5,2637.5 3064,2496 v1(3520,2496) ; v1(2192,4904) 2288,5000 2288,5675.5 SW15.15@2350,5737.5
PG2: CON28.5 RL17.1 U15.2 | length 7026.5
  Top w8: v1(3552,2528) 3648,2528 3685.93,2565.93 U15.2@3685.93,2613.19 ; v2(7888,4987.5) RL17.1@7932.5,4987.5
  Bottom w8: CON28.5@2825,2687.5 2920.5,2687.5 3080,2528 v1(3552,2528) 3568,2512 3568,2352 3720,2200 4696,2200 5344,2848 5344,3312 5456,3424 6184,3424 7747.5,4987.5 v2(7888,4987.5)
PG3: CON28.6 RL18.1 U15.1 | length 7138.6
  Top w8: v1(3584,2560) 3656,2560 3670.18,2574.18 U15.1@3670.18,2613.19 ; v2(7888,5062.5) RL18.1@7932.5,5062.5
  Bottom w8: CON28.6@2725,2687.5 2775,2737.5 2918.5,2737.5 3096,2560 v1(3584,2560) 3600,2544 3600,2352 3736,2216 4688,2216 5328,2856 5328,3320 5448,3440 6176,3440 7798.5,5062.5 v2(7888,5062.5)
PG4: CON17.3 U15.121 | length 1046.9
  Top w8: CON17.3@4187.5,4387.5 4248,4448 4360,4448 4384,4424 4384,3972.15 4315.85,3904 U15.121@4315.85,3636.81
PG5: CON17.4 U15.122 | length 697.3
  Top w8: CON17.4@4187.5,4287.5 4187.5,4136 4300.1,4023.4 U15.122@4300.1,3636.81
PG6: CON35.3 RL19.1 U15.29 | length 8369.7
  Top w8: 4106,2250 4111.12,2255.12 U15.29@4111.12,2613.19
  Top w10: CON35.3@3162.5,1587.5 3162.5,1520 3210.5,1472 3440,1472 3488,1520 3488,1712 3536,1760 3616,1760 4106,2250 ; v2(7888,4762.5) RL19.1@7932.5,4762.5
  Bottom w10: CON35.3@3162.5,1587.5 3112,1638 3112,1768 3168,1824 3424,1824 3784,2184 4712,2184 5360,2832 5360,3304 5464,3408 6192,3408 7546.5,4762.5 v2(7888,4762.5)
PG7: CON35.4 RL20.1 U15.28 | length 8176.7
  Top w8: CON35.4@3162.5,1687.5 3212.5,1637.5 3212.5,1555.5 3272,1496 3424,1496 3464,1536 3464,1720 3528,1784 3608,1784 4095.37,2271.37 U15.28@4095.37,2613.19 ; v2(7888,4687.5) RL20.1@7932.5,4687.5
  Bottom w8: CON35.4@3162.5,1687.5 3162.5,1776 3194.5,1808 3432,1808 3792,2168 4728,2168 5376,2816 5376,3296 5472,3392 6200,3392 7495.5,4687.5 v2(7888,4687.5)
PG8: CON35.5 RL21.1 U15.27 | length 8333.9
  Top w8: CON35.5@3262.5,1587.5 3330,1520 3408,1520 3440,1552 3440,1728 3520,1808 3600,1808 4079.63,2287.63 U15.27@4079.63,2613.19 ; v2(7888,4912.5) RL21.1@7932.5,4912.5
  Bottom w8: CON35.5@3262.5,1587.5 3216,1634 3216,1760 3248,1792 3440,1792 3800,2152 4736,2152 5392,2808 5392,3288 5480,3376 6208,3376 7488,4656 7904,4656 7928,4680 7928,4776 7912,4792 7872,4792 7856,4808 7856,4888 7880,4912 v2(7888,4912.5)
PG9: CON35.6 RL22.1 U15.26 | length 7856.1
  Top w8: CON35.6@3262.5,1687.5 3351,1776 3456,1776 3512,1832 3592,1832 4063.88,2303.88 U15.26@4063.88,2613.19 ; v2(7888,4837.5) RL22.1@7932.5,4837.5
  Bottom w8: CON35.6@3262.5,1687.5 3262.5,1752 3286.5,1776 3448,1776 3808,2136 4744,2136 5408,2800 5408,3280 5488,3360 6216,3360 7496,4640 7912,4640 7944,4672 7944,4816 7922.5,4837.5 v2(7888,4837.5)
PG10: CON34.3 SW15.14 SW37.5 U15.9 | length 8783.6
  Top w8: v1(2144,2792) 2144,3248 2208,3312 2208,4776 2480,5048 2480,5507.5 SW15.14@2350,5637.5 ; CON34.3@2462.5,1587.5 2462.5,1513.5 2520,1456 2800,1456 2864,1520 2864,1872 3360,2368 3656,2368 3796.16,2508.16 U15.9@3796.16,2613.19
  Bottom w8: SW37.5@1600,1640 1552,1592 1552,1512 1574,1490 1662,1490 1696,1456 1696,1176 1752,1120 2256,1120 2462.5,1326.5 CON34.3@2462.5,1587.5 2512.5,1637.5 2512.5,1863.5 2424,1952 2080,1952 1920,2112 1920,2688 2000,2768 2120,2768 v1(2144,2792)
PG11: CON34.4 SW15.13 SW37.4 U15.8 | length 8482.7
  Top w8: v1(2112,2808) 2112,3240 2192,3320 2192,4784 2464,5056 2464,5423.5 SW15.13@2350,5537.5 ; CON34.4@2462.5,1687.5 2512.5,1637.5 2512.5,1511.5 2552,1472 2792,1472 2848,1528 2848,1888 3344,2384 3648,2384 3780.41,2516.41 U15.8@3780.41,2613.19
  Bottom w8: SW37.4@1600,1540 1692,1540 1712,1520 1712,1184 1760,1136 2232,1136 2412.5,1316.5 2412.5,1637.5 CON34.4@2462.5,1687.5 2462.5,1881.5 2408,1936 2072,1936 1904,2104 1904,2704 1984,2784 2088,2784 v1(2112,2808)
PG12: CON34.5 SW15.12 SW37.3 U15.7 | length 8188.8
  Top w8: v1(2080,2728) 2080,3232 2176,3328 2176,4792 2448,5064 2448,5339.5 SW15.12@2350,5437.5 ; CON34.5@2562.5,1587.5 2562.5,1517.5 2592,1488 2784,1488 2832,1536 2832,1904 3328,2400 3640,2400 3764.67,2524.67 U15.7@3764.67,2613.19
  Bottom w8: SW37.3@1600,1440 1680,1360 1680,1168 1744,1104 2288,1104 2562.5,1378.5 CON34.5@2562.5,1587.5 2612.5,1637.5 2612.5,1827.5 2456,1984 2096,1984 1952,2128 1952,2656 2000,2704 2056,2704 v1(2080,2728)
PG13: CON34.6 SW15.11 SW37.2 U15.6 | length 7888.3
  Top w8: v1(2048,2744) 2048,3224 2160,3336 2160,4800 2432,5072 2432,5255.5 SW15.11@2350,5337.5 ; CON34.6@2562.5,1687.5 2608,1642 v1(2608,1520) 2792,1520 2816,1544 2816,1920 3312,2416 3632,2416 3748.92,2532.92 U15.6@3748.92,2613.19
  Bottom w8: SW37.2@1600,1340 1664,1276 1664,1160 1736,1088 2352,1088 2608,1344 v1(2608,1520) ; v1(2048,2744) 2024,2720 1984,2720 1936,2672 1936,2120 2088,1968 2440,1968 2562.5,1845.5 CON34.6@2562.5,1687.5
PG14: CON34.7 SW15.10 SW37.1 U15.5 | length 7535.3
  Top w8: v1(2016,2672) 2016,3216 2144,3344 2144,4808 2288,4952 2288,5175.5 SW15.10@2350,5237.5 ; CON34.7@2662.5,1587.5 2712.5,1637.5 2712.5,1856.5 3288,2432 3624,2432 3733.17,2541.17 U15.5@3733.17,2613.19
  Bottom w8: SW37.1@1600,1240 1600,1168 1696,1072 2366.5,1072 2662.5,1368 CON34.7@2662.5,1587.5 2712.5,1637.5 2712.5,1759.5 2472,2000 2104,2000 1968,2136 1968,2624 v1(2016,2672)
PH0: CON19.3 R83.1 R84.2 U15.198 | length 4925.9
  Top w8: R83.1@542.5,2850 R84.2@607.5,2850 607.5,2858.61 633.75,2876.25 749.5,2992 1248,2992 1560,3304 1760,3304 v1(1928,3472) ; U15.198@3575.69,2991.14 3760,2991.14 3824,3055.14 3824,3304 v1(3800,3328)
  Bottom w8: v1(1928,3472) 2288,3824 2288,3872 2352,3936 2509.87,3936 2709.87,3736 2776.5,3736 CON19.3@2825,3687.5 2775,3637.5 2669.5,3637.5 2656,3624 2656,3552 2720,3488 3144,3488 3304,3328 v1(3800,3328)
PH1: CON19.4 SW30.2 SW30.3 U15.197 | length 4043.6
  Top w8: v1(2412,3264) 2436,3240 2584,3240 v1(2784,3440) ; U15.197@3575.69,3006.89 3752,3006.89 3792.56,3047.44 3792,3048 v1(3792,3264)
  Bottom w8: SW30.2@1600,2474.5 SW30.3@1600,2574.5 1552,2622.5 1552,3200 1616,3264 v1(2412,3264) ; CON19.4@2725,3687.5 2664,3687.5 2640,3663.5 2640,3544 2744,3440 v1(2784,3440) 3168,3440 3296,3312 3768,3312 3792,3288 v1(3792,3264)
PH2: CON19.5 SW17.1 SW18.1 U15.168 | length 5746.5
  Top w8: v1(2752,3968) 2752,4064 2576,4240 2576,4400 2448,4528 2352,4528 2312,4568 2312,4720 2576,4984 3560,4984 3576,5000 v1(3608,5000) ; CON19.5@2825,3787.5 3108.5,3787.5 3200,3696 3200,3608 3360,3448 3408,3448 3423.58,3463.58 U15.168@3575.69,3463.58 ; v1(4100,4912.5) 4400,4912.5 4650,5162.5 SW18.1@4687.5,5162.5
  Bottom w8: v1(2752,3968) 2775,3945 2775,3837.5 CON19.5@2825,3787.5 ; v1(3608,5000) 3696,4912.5 v1(4100,4912.5) ; SW18.1@4687.5,5162.5 4737.5,5112.5 5225,5112.5 SW17.1@5512.5,5400
PH3: CON19.6 SW17.2 SW18.2 U15.167 | length 5859.3
  Top w8: v1(3544,5008) 2576,5008 2296,4728 2296,4560 2344,4512 2440,4512 2560,4392 2560,4224 2656,4128 2656,3856.5 CON19.6@2725,3787.5 2775,3837.5 3082.5,3837.5 3216,3704 3216,3616 3368,3464 3400,3464 3415.33,3479.33 U15.167@3575.69,3479.33 ; v1(4064,4880) 4416,4880 4598.5,5062.5 SW18.2@4687.5,5062.5
  Bottom w8: v1(3544,5008) 3672,4880 v1(4064,4880) ; SW18.2@4687.5,5062.5 4737.5,5012.5 5225,5012.5 SW17.2@5512.5,5300
PH4: CON25.3 RB13.1 SW26.1 U15.71 | length 7773.5
  Top w8: U15.71@4599.31,2959.65 4920,2959.65 5000.35,3040 5264,3040 5312,2992 5312,2776 5500.5,2587.5 5600,2587.5 CON25.3@5650,2637.5 ; v2(8144,2808) 8240,2712 8688,2712 9000,3024 9000,3362.2 SW26.1@8897.64,3464.57 ; v1(9520,2075) RB13.1@9570,2075
  Bottom w8: CON25.3@5650,2637.5 5773.5,2637.5 5944,2808 v2(8144,2808) ; SW26.1@8897.64,3464.57 8800,3366.93 8800,2784 8864,2720 9544,2720 9608,2656 9608,2107 9576,2075 v1(9520,2075)
PH5: CON25.4 RB14.1 SW26.2 U15.72 | length 7528.8
  Top w8: U15.72@4599.31,2975.39 4912,2975.39 4992.61,3056 5280,3056 5328,3008 5328,2808 5498.5,2637.5 CON25.4@5550,2637.5 ; v2(8160,2848) 8192,2816 8768,2816 8984,3032 8984,3278.2 SW26.2@8897.64,3364.57 ; v1(9520,2000) RB14.1@9570,2000
  Bottom w8: CON25.4@5550,2637.5 5592.5,2680 5784,2680 5928,2824 8048,2824 8072,2848 v2(8160,2848) ; SW26.2@8897.64,3364.57 8816,3282.93 8816,2792 8872,2736 9552,2736 9624,2664 9624,2040 9584,2000 v1(9520,2000)
PH6: CON25.5 RB15.1 SW26.3 U15.73 | length 7308.3
  Top w8: U15.73@4599.31,2991.14 4896,2991.14 4976.86,3072 5288,3072 5344,3016 5344,2832 5480,2696 5608.5,2696 CON25.5@5650,2737.5 ; v2(8128,2880) 8160,2912 8840,2912 8968,3040 8968,3194.2 SW26.3@8897.64,3264.57 ; v1(9520,1925) RB15.1@9570,1925
  Bottom w8: CON25.5@5650,2737.5 5809.5,2737.5 5912,2840 8040,2840 8080,2880 v2(8128,2880) ; SW26.3@8897.64,3264.57 8832,3198.93 8832,2800 8880,2752 9560,2752 9640,2672 9640,1965 9600,1925 v1(9520,1925)
PH7: CON25.6 RB16.1 U15.74 | length 6208
  Top w8: U15.74@4599.31,3006.89 4880,3006.89 4961.11,3088 5304,3088 5360,3032 5360,2856 5478.5,2737.5 CON25.6@5550,2737.5 ; v2(6584,2904) 7112,2904 7312,2704 v2(7312,2032) ; v1(9520,1850) RB16.1@9570,1850
  Bottom w8: CON25.6@5550,2737.5 5596.5,2784 5824,2784 5896,2856 6536,2856 v2(6584,2904) ; v2(7312,2032) 7312,1936 7328,1920 8640,1920 8710,1850 v1(9520,1850)
PH8: CON25.7 RB17.1 U15.75 | length 6191.1
  Top w8: U15.75@4599.31,3022.64 4806.64,3022.64 4888,3104 5312,3104 5376,3040 5376,2880 5468.5,2787.5 5600,2787.5 CON25.7@5650,2837.5 ; v2(6504,2888) 6552,2888 6568,2872 7120,2872 7280,2712 v2(7280,1992) ; v1(9520,1775) RB17.1@9570,1775
  Bottom w8: CON25.7@5650,2837.5 5845.5,2837.5 5880,2872 6488,2872 v2(6504,2888) ; v2(7280,1992) 7280,1928 7304,1904 8624,1904 8753,1775 v1(9520,1775)
PH9: CON25.8 RB18.1 SW26.4 U15.76 | length 7224.1
  Top w8: U15.76@4599.31,3038.39 4798.39,3038.39 4880,3120 5328,3120 5392,3056 5392,2904 5458.5,2837.5 CON25.8@5550,2837.5 ; v2(8088,2912) 8128,2912 8232,3016 8920,3016 8952,3048 8952,3110.2 SW26.4@8897.64,3164.57 ; v1(9520,1700) RB18.1@9570,1700
  Bottom w8: CON25.8@5550,2837.5 5600.5,2888 6456,2888 6504,2936 8064,2936 v2(8088,2912) ; SW26.4@8897.64,3164.57 8848,3114.93 8848,2808 8888,2768 9568,2768 9656,2680 9656,1732 9624,1700 v1(9520,1700)
PH10: CON25.9 RB19.1 SW26.5 U15.77 | length 6918.4
  Top w8: U15.77@4599.31,3054.13 4790.13,3054.13 4872,3136 5344,3136 5408,3072 5408,2960 5480.5,2887.5 5600,2887.5 CON25.9@5650,2937.5 ; v2(8104,2952) 8264,3112 8850.2,3112 SW26.5@8897.64,3064.57 ; v2(9520,1625) RB19.1@9570,1625
  Bottom w8: CON25.9@5650,2937.5 6480,2937.5 6494.5,2952 v2(8104,2952) ; SW26.5@8897.64,3064.57 8897.64,2814.36 8928,2784 9576,2784 9672,2688 9672,1688 9609,1625 v2(9520,1625)
PH11: CON25.10 RB20.1 U15.78 | length 6287
  Top w8: U15.78@4599.31,3069.88 4781.88,3069.88 4864,3152 5360,3152 5424,3088 5424,2977.5 5464,2937.5 CON25.10@5550,2937.5 ; v2(6424,2984) 6464,2944 6464,2880 6496,2848 7120,2848 7248,2720 v2(7248,2032) ; v1(9520,1550) RB20.1@9570,1550
  Bottom w8: CON25.10@5550,2937.5 5596.5,2984 v2(6424,2984) ; v2(7248,2032) 7248,1904 7408,1744 8120,1744 8144,1720 8712,1720 8882,1550 v1(9520,1550)
PH12: CON25.11 RB1.1 U15.79 | length 2860.6
  Top w8: U15.79@4599.31,3085.63 4773.63,3085.63 4856,3168 5376,3168 5440,3104 5440,3040 5492.5,2987.5 5600,2987.5 CON25.11@5650,3037.5 ; v2(7248,3062.5) RB1.1@7282.5,3062.5
  Bottom w8: CON25.11@5650,3037.5 5675,3062.5 v2(7248,3062.5)
PH13: CON25.12 RB2.1 U15.83 | length 2834.2
  Top w8: U15.83@4599.31,3148.62 4812.62,3148.62 4848,3184 5392,3184 5456,3120 5456,3061.5 5480,3037.5 CON25.12@5550,3037.5 ; v2(7248,3137.5) RB2.1@7282.5,3137.5
  Bottom w8: CON25.12@5550,3037.5 5600.5,3088 5664,3088 5713.5,3137.5 v2(7248,3137.5)
PH14: CON25.13 RB3.1 SW17.3 U15.84 | length 5126.2
  Top w8: U15.84@4599.31,3164.37 4804.37,3164.37 4840,3200 5408,3200 5520.5,3087.5 5600,3087.5 CON25.13@5650,3137.5 5784,3271.5 5784,3328 5904,3448 5904,4464 5568,4800 5568,5144.5 SW17.3@5512.5,5200 ; v2(7248,3212.5) RB3.1@7282.5,3212.5
  Bottom w8: CON25.13@5650,3137.5 5725,3212.5 v2(7248,3212.5)
PH15: CON25.14 RB4.1 SW17.4 U15.85 | length 5083.7
  Top w8: U15.85@4599.31,3180.12 4796.12,3180.12 4832,3216 5471.5,3216 CON25.14@5550,3137.5 5604.5,3192 5672,3192 5752,3272 5752,3328 5880,3456 5880,4456 5512.5,4823.5 SW17.4@5512.5,5100 ; v2(7248,3287.5) RB4.1@7282.5,3287.5
  Bottom w8: CON25.14@5550,3137.5 5604.5,3192 5672,3192 5712,3232 7192.5,3232 v2(7248,3287.5)
PHYAD0: CON18.9 R73.2 U14.11 | length 1560.2
  Top w8: CON18.9@571.95,4004.92 690.08,4004.92 R73.2@695,4000 v1(695,3952) ; U14.11@1828.24,4025.88 1878.12,4025.88 v1(1904,4000)
  Bottom w8: v1(695,3952) 759,3888 1824,3888 1904,3968 v1(1904,4000)
PHYAD3: R62.1 R64.1 U14.12 | length 1672.4
  Top w8: U14.12@1828.24,4041.63 1896,4041.63 1902.37,4048 v2(1904,4048)
  Top w40: R64.1@755,4462.5 R62.1@755,4537.5 800,4584 v2(1400,4587.5) v2(1412.5,4562.5)
  Bottom w40: v2(1400,4587.5) v2(1412.5,4562.5) 1412.5,4525 1411.75,4524.25 1672,4264 1808,4264 1880,4192 1880,4072 v2(1904,4048)
PHYAVD33: CB9.2 CT32.1 L11.2 U14.31 | length 438.9
  Top w8: 1576,3986.13 1600,4010.13 U14.31@1670.76,4010.13
  Top w40: L11.2@1420,3901 1420,3838.5 CB9.2@1427.5,3831 CT32.1@1502.5,3831 1501.87,3831.63 1501.87,3912 1576,3986.13
PHYIOVD33: CT34.1 L12.2 R66.2 R67.2 R69.2 R76.2 U14.13 | length 1771.5
  Top w8: U14.13@1828.24,4057.37 1865.37,4057.37 1896,4088 v2(1936,4088)
  Top w40: L12.2@1592,3687 L12.2@1592,3680 ; CT34.1@1599.5,3617 1592.5,3624 1592,3624 L12.2@1592,3680 ; R66.2@1650,4330 v2(1650,4376) ; R67.2@1725,4330 v2(1725,4376) ; R76.2@1825,3795 1825,3736 ; R69.2@1875,4330 v2(1875,4375) ; v2(1968,3736) 1825,3736 ; L12.2@1592,3680 1769,3680 1825,3736
  Bottom w40: v2(1650,4376) v2(1725,4376) 1773.55,4327.45 1828,4327.45 1875,4374.45 v2(1875,4375) 1936,4314 v2(1936,4088) 2016,4008 2016,3784 v2(1968,3736)
PHYTEST: R65.2 R66.1 U14.24 | length 263.7
  Top w8: R65.2@1575,4270 R66.1@1640,4270 ; R66.1@1650,4270 R66.1@1640,4270 ; U14.24@1694.38,4128.24 1694.38,4144 1664,4144 1632,4176 1632,4262 R66.1@1640,4270
PI0: CON22.3 RB21.1 RS1.1 U15.86 | length 9256.5
  Top w8: U15.86@4599.31,3195.87 4787.87,3195.87 4824,3232 4944,3232 5249.5,3537.5 5600,3537.5 CON22.3@5650,3587.5 ; v1(9456,1465) 9440,1481 9440,2664 9552,2776 9552,3489.5 v1(9600,3537.5) RS1.1@9645,3537.5 ; v1(9520,1465) 9560,1465 RB21.1@9570,1475
  Bottom w8: CON22.3@5650,3587.5 5699.5,3587.5 5760,3648 6360,3648 7808,5096 8632,5096 9040,4688 9040,3809.5 9312,3537.5 v1(9600,3537.5) ; v1(9456,1465) v1(9520,1465)